# EAGLE board PI2GENESIS-HUB_V20170403 (EAGLE 8.2.2)
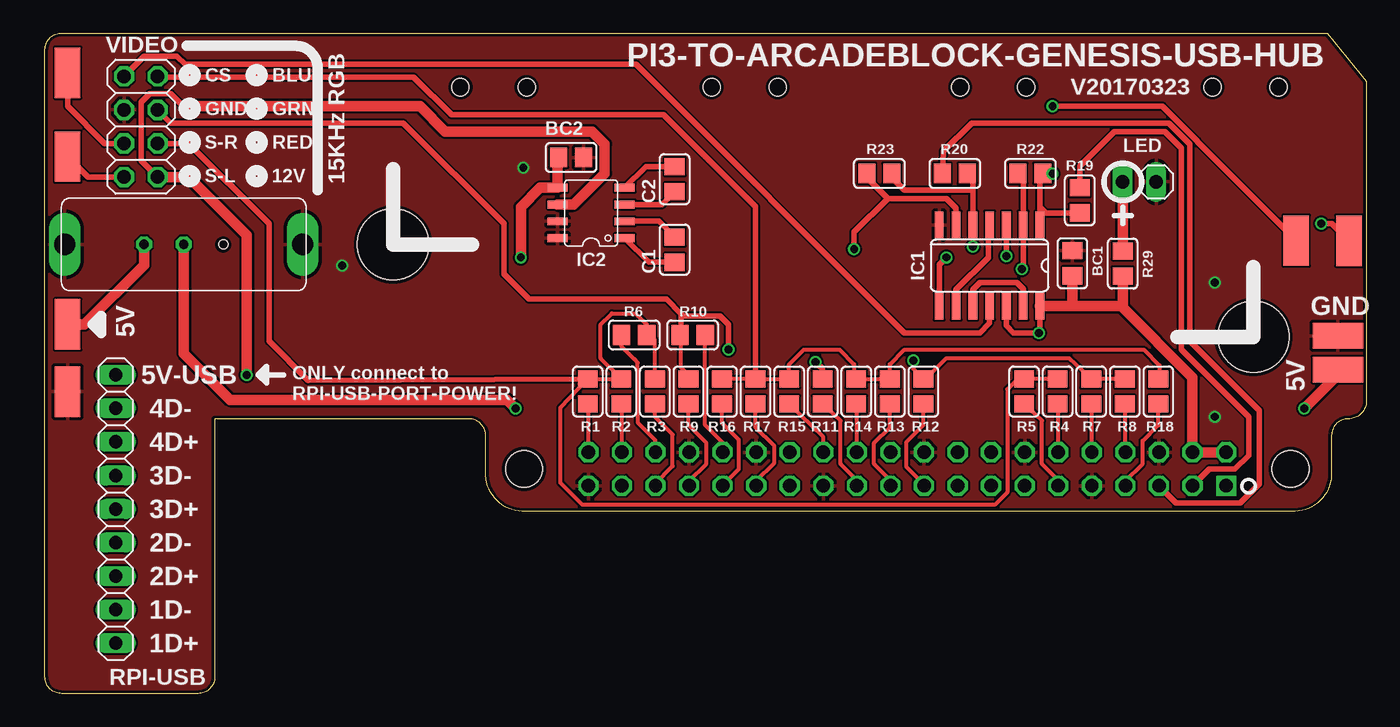
[diagram p0: board, top side]
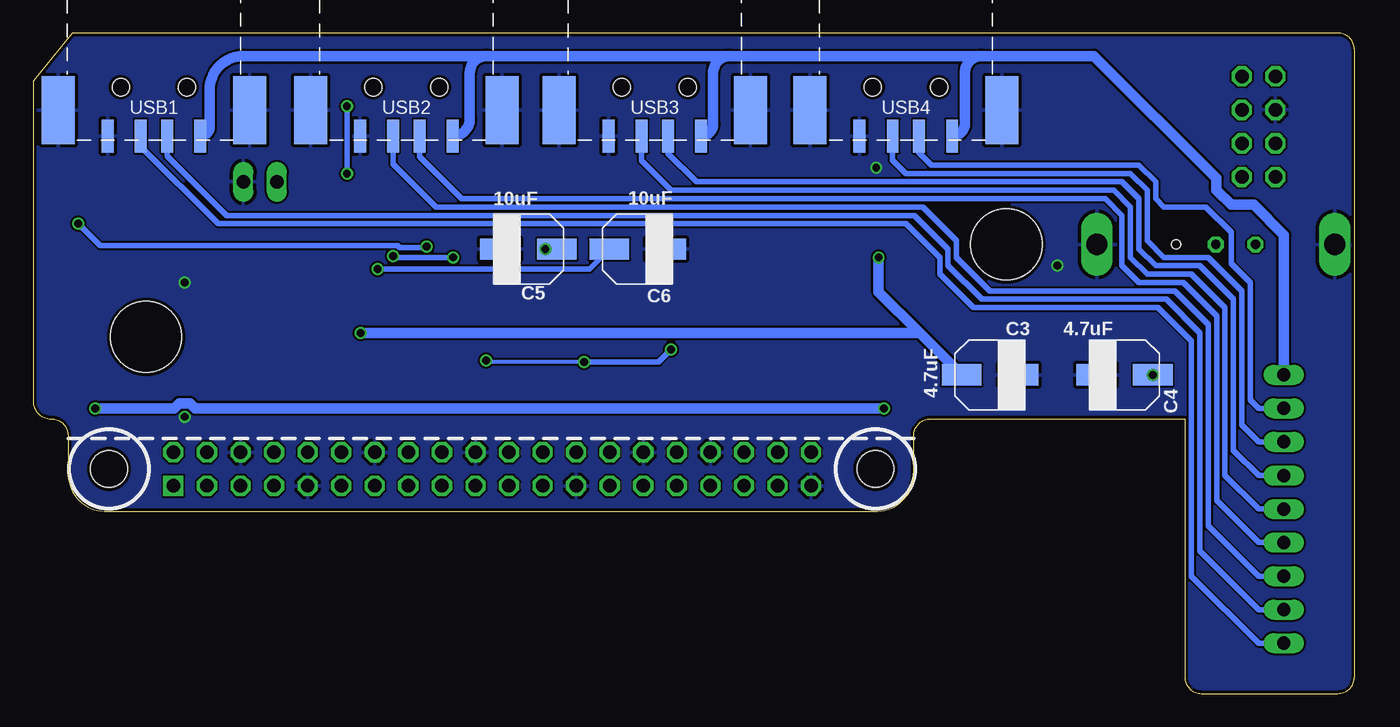
[diagram p1: board, bottom side, seen from below]

Size 100 x 50 mm. Coordinates in mm from the lower left corner, seen from the top.
Outline: 100,46.35 100,22.13 arc-90 98.62,20.8 arc90 97.35,19.53 97.35,16.5 arc-90 94.35,13.8 36.35,13.8 arc-90 33.35,16.5 33.35,19.53 arc90 32.08,20.8 12.85,20.8 12.85,1.27 arc-90 11.58,0 1.27,0 arc-90 0,1.27 0,48.73 arc-90 1.27,50 97.05,50 100,46.35
Copper layers (1*16): Top 0.035mm / dielectric 1.5mm / Bottom 0.035mm
Design rules "ITEADstudioDRC": minimum track width 6mil, minimum drill 12mil, track to track 6mil, track to pad 6mil, pad to pad 6mil, via to via 6mil, smd to smd 0mil, copper to edge 10mil, drill to drill 10mil, minimum pad ring 10mil, minimum via ring 6mil, stop-mask expansion 2mil, vias tented up to drill 100mil, thermal gap 10mil
Holes 5.4 mm at 91.45,27 26.35,34

## Footprints (pad centres in the part's own frame; a part is rotated, then mirrored left to right if it is on the bottom)
Z0805 = smd 1.3 x 1.5: 1 -0.95,0; 2 0.95,0
EEEFPJ101UAR_PANASONIC_VFP-SERIES = smd 1.6 x 3: MINUS 0,2.15; PLUS 0,-2.15
SO14 = smd 0.66 x 2.032: 1 -3.81,-3.073; 2 -2.54,-3.073; 3 -1.27,-3.073; 4 0,-3.073; 5 1.27,-3.073; 6 2.54,-3.073; 7 3.81,-3.073; 8 3.81,3.073; 9 2.54,3.073; 10 1.27,3.073; 11 0,3.073; 12 -1.27,3.073; 13 -2.54,3.073; 14 -3.81,3.073
SO-8 = smd 0.6 x 1.5: 1 -1.905,-2.54; 2 -0.635,-2.54; 3 0.635,-2.54; 4 1.905,-2.54; 5 1.905,2.54; 6 0.635,2.54; 7 -0.635,2.54; 8 -1.905,2.54
1X02 = drill 1.016 long: 1 -1.27,0; 2 1.27,0
PADS = smd 1.93 x 3.81: P$1 0,0
RPI3-GPIO = drill 1.016 square: 1 -24.13,-1.27 | drill 1.016 octagon: 2 -24.13,1.27; 3 -21.59,-1.27; 4 -21.59,1.27; 5 -19.05,-1.27; 6 -19.05,1.27; 7 -16.51,-1.27; 8 -16.51,1.27; 9 -13.97,-1.27; 10 -13.97,1.27; 11 -11.43,-1.27; 12 -11.43,1.27; 13 -8.89,-1.27; 14 -8.89,1.27; 15 -6.35,-1.27; 16 -6.35,1.27; 17 -3.81,-1.27; 18 -3.81,1.27; 19 -1.27,-1.27; 20 -1.27,1.27; 21 1.27,-1.27; 22 1.27,1.27; 23 3.81,-1.27; 24 3.81,1.27; 25 6.35,-1.27; 26 6.35,1.27; 27 8.89,-1.27; 28 8.89,1.27; 29 11.43,-1.27; 30 11.43,1.27; 31 13.97,-1.27; 32 13.97,1.27; 33 16.51,-1.27; 34 16.51,1.27; 35 19.05,-1.27; 36 19.05,1.27; 37 21.59,-1.27; 38 21.59,1.27; 39 24.13,-1.27; 40 24.13,1.27 | hole 2.8: -29,0; 29,0
1X09 = drill 1.016 long: 1 -10.16,0; 2 -7.62,0; 3 -5.08,0; 4 -2.54,0; 5 0,0; 6 2.54,0; 7 5.08,0; 8 7.62,0; 9 10.16,0
ALPS-SSSU011700 = drill 1.6 long: GND@1 9,0; GND@2 -9,0 | drill 0.7 octagon: VCC@1 0,0; VCC@2 3,0 | hole 0.7: -3,0
USB-GENESIS-HUB = smd 0.9 x 2.5: 1 -3.5,3.7; 2 -1,3.7; 3 1,3.7; 4 3.5,3.7 | smd 2.5 x 5.15: GND@1 -7.25,1.725; GND@2 7.25,1.725 | hole 1.3: -2.5,0; 2.5,0
2X04 = drill 1.016 octagon: 1 -3.81,-1.27; 2 -3.81,1.27; 3 -1.27,-1.27; 4 -1.27,1.27; 5 1.27,-1.27; 6 1.27,1.27; 7 3.81,-1.27; 8 3.81,1.27

## Placement (x,y rotation side)
BC1  100nF  [Z0805]  77.75,32.57 90 top
BC2  100nF  [Z0805]  39.81,40.58 180 top
C1  220nF  [Z0805]  47.65,33.6 90 top
C2  220nF  [Z0805]  47.65,38.94 90 top
C3  4.7uF  [EEEFPJ101UAR_PANASONIC_VFP-SERIES]  27.58,24.13 270 bottom
C4  4.7uF  [EEEFPJ101UAR_PANASONIC_VFP-SERIES]  17.42,24.13 90 bottom
C5  10uF  [EEEFPJ101UAR_PANASONIC_VFP-SERIES]  62.5,33.66 90 bottom
C6  10uF  [EEEFPJ101UAR_PANASONIC_VFP-SERIES]  54.25,33.66 270 bottom
IC1  4070D  [SO14]  71.48,32.4 180 top
IC2  ST662A  [SO-8]  41.33,36.38 90 top
LED  LED  [1X02]  82.82,38.73 0 top
PAD1  HS  [PADS]  98.66,34.28 0 top
PAD2  VS  [PADS]  94.68,34.29 0 top
R1  499  [Z0805]  41.07,22.86 90 top
R2  1K  [Z0805]  43.61,22.86 90 top
R3  2K  [Z0805]  46.15,22.86 90 top
R4  4K  [Z0805]  76.63,22.86 90 top
R5  8K  [Z0805]  74.09,22.86 90 top
R6  16K  [Z0805]  44.59,27.15 0 top
R7  499  [Z0805]  79.17,22.86 90 top
R8  1K  [Z0805]  81.71,22.86 90 top
R9  2K  [Z0805]  48.69,22.86 90 top
R10  4K  [Z0805]  49.01,27.15 180 top
R11  8K  [Z0805]  58.85,22.86 90 top
R12  16K  [Z0805]  66.47,22.86 90 top
R13  499  [Z0805]  63.93,22.86 90 top
R14  1K  [Z0805]  61.39,22.86 90 top
R15  2K  [Z0805]  56.31,22.86 90 top
R16  4K  [Z0805]  51.23,22.86 90 top
R17  8K  [Z0805]  53.77,22.86 90 top
R18  16K  [Z0805]  84.25,22.86 90 top
R19  120  [Z0805]  78.3,37.34 90 top
R20  120  [Z0805]  68.85,39.37 180 top
R22  4K7  [Z0805]  74.57,39.37 0 top
R23  4K7  [Z0805]  63.14,39.37 0 top
R29  220  [Z0805]  81.55,32.55 270 top
RPI3  GPIO  [RPI3-GPIO]  65.25,17 0 bottom
RPI-USB  RPI-USB  [1X09]  5.35,13.97 90 top
U$1  OUT  [PADS]  97.84,24.53 270 top
U$2  SND-L  [PADS]  1.72,40.64 180 top
U$3  SND-R  [PADS]  1.72,46.99 180 top
U$4  ALPS-SSSU011700  [ALPS-SSSU011700]  10.5,34 180 top
U$5  IN  [PADS]  1.72,27.94 180 top
U$6  GND  [PADS]  1.72,22.86 180 top
U$7  GND  [PADS]  97.84,27.07 90 top
USB1  USB-GENESIS-HUB  [USB-GENESIS-HUB]  90.85,45.9 180 bottom
USB2  USB-GENESIS-HUB  [USB-GENESIS-HUB]  71.75,45.9 180 bottom
USB3  USB-GENESIS-HUB  [USB-GENESIS-HUB]  52.95,45.9 180 bottom
USB4  USB-GENESIS-HUB  [USB-GENESIS-HUB]  33.95,45.9 180 bottom
VIDEO  VIDEO  [2X04]  7.26,42.91 270 top

## Library data of the parts
BC1 BC2 C1-C6 IC2 PAD1 PAD2 R1-R20 R22 R23 R29 RPI3 U$1-U$7 USB1-USB4 = arcadetv
IC1 = 40xx
LED RPI-USB VIDEO = pinhead

## Nets
+3V3: RPI3.1
+5V: BC1.1 BC2.2 C3.PLUS IC1.12 IC1.14 IC2.5 R29.2 RPI3.2 RPI3.4
+5V-IN: U$4.VCC@2 U$5.P$1
+5V-OUT: U$1.P$1 U$4.VCC@1
+12V: C4.PLUS IC2.6 VIDEO.8
B: R13.2 R14.2 R15.2 R16.2 R17.2 R18.2 VIDEO.2
CS: IC1.11 VIDEO.1
G: R7.2 R8.2 R9.2 R10.2 R11.2 R12.2 VIDEO.4
GND: BC1.2 BC2.1 C3.MINUS C4.MINUS C5.MINUS C6.MINUS IC1.7 IC2.7 IC2.8 LED.2 RPI3.6 RPI3.9 RPI3.14 RPI3.20 RPI3.25 RPI3.30 RPI3.34 RPI3.39 U$4.GND@1 U$4.GND@2 U$6.P$1 U$7.P$1 USB1.4 USB1.GND@1 USB1.GND@2 USB2.4 USB2.GND@1 USB2.GND@2 USB3.4 USB3.GND@1 USB3.GND@2 USB4.4 USB4.GND@1 USB4.GND@2 VIDEO.3
GPIO2: R19.2 RPI3.3
GPIO3: R20.2 RPI3.5
GPIO4: R18.1 RPI3.7
GPIO5: R17.1 RPI3.29
GPIO6: R16.1 RPI3.31
GPIO7: R15.1 RPI3.26
GPIO8: R14.1 RPI3.24
GPIO9: R13.1 RPI3.21
GPIO10: R12.1 RPI3.19
GPIO11: R11.1 RPI3.23
GPIO12: R10.1 RPI3.32
GPIO13: R9.1 RPI3.33
GPIO14: R8.1 RPI3.8
GPIO15: R7.1 RPI3.10
GPIO16: R6.1 RPI3.36
GPIO17: R5.1 RPI3.11
GPIO18: R4.1 RPI3.12
GPIO19: R3.1 RPI3.35
GPIO20: R2.1 RPI3.38
GPIO21: R1.1 RPI3.40
N$1: C1.2 IC2.2
N$2: C1.1 IC2.1
N$3: C2.1 IC2.3
N$4: C2.2 IC2.4
N$6: LED.1 R29.1
N$7: IC1.1 PAD2.P$1 R19.1 R22.2
N$8: C5.PLUS IC1.6 R23.1
N$9: IC1.4 IC1.9
N$10: IC1.10 IC1.13
N$11: IC1.5 PAD1.P$1 R20.1 R23.2
N$13: IC1.3 IC1.8
N$14: C6.PLUS IC1.2 R22.1
R: R1.2 R2.2 R3.2 R4.2 R5.2 R6.2 VIDEO.6
SND-L: U$2.P$1 VIDEO.7
SND-R: U$3.P$1 VIDEO.5
USB1-D+: RPI-USB.1 USB1.3
USB1-D-: RPI-USB.2 USB1.2
USB2-D+: RPI-USB.3 USB2.3
USB2-D-: RPI-USB.4 USB2.2
USB3-D+: RPI-USB.5 USB3.3
USB3-D-: RPI-USB.6 USB3.2
USB4-D+: RPI-USB.7 USB4.3
USB4-D-: RPI-USB.8 USB4.2
VCC/2: RPI-USB.9 USB1.1 USB2.1 USB3.1 USB4.1

## Tracks (layer width: path | path; a pad name or v marks a point on that pad's centre or on a via)
+5V  (via drill 0.6)
  Top 0.406: IC1.14 75.29,27.39 v75.2,27.3 73.3,27.3 72.75,27.85 IC1.12
  Top 0.813: RPI3.2 RPI3.4 86.84,23.92 81.44,29.33 | 77.75,29.33 81.44,29.33 | IC1.14 77.75,29.33 | BC1.1 77.75,29.33 | 81.44,29.33 81.55,29.45 R29.2 | v36.01,33.02 36.01,36.83 37.47,38.29 IC2.5 38.79,40.51 BC2.2
  Bottom 0.813: C3.PLUS 32.9,27.3 | 32.9,27.3 v75.2,27.3 | 32.9,27.3 36.01,30.41 v36.01,33.02
+5V-IN
  Top 0.813: U$4.VCC@2 7.5,32.45 2.99,27.94 U$5.P$1
+5V-OUT  (via drill 0.6)
  Top 0.813: U$4.VCC@1 10.5,25.75 14.02,22.23 34.97,22.23 v35.61,21.59 | v95.3,21.59 97.84,24.13 U$1.P$1
  Bottom 0.813: v35.61,21.59 87.74,21.59 88.12,21.97 88.96,21.97 89.33,21.59 v95.3,21.59
+12V  (via drill 0.6)
  Top 0.406: 10.61,44.45 10.45,44.45 9.5,45.4 7.91,45.4 7.27,44.77 7.27,40.35 VIDEO.8
  Top 0.813: VIDEO.8 10.88,39.1 15.27,34.71 C4.PLUS | IC2.6 40.01,37.02 42.36,39.37 42.36,41.59 41.41,42.55 30.29,42.55 28.39,44.45 10.61,44.45
  other vias: 15.27,24.13
B
  Top 0.305: R16.2 R17.2 R15.2 56.31,24.92 57.42,26.04 60.12,26.04 61.23,24.92 61.23,23.87 R14.2 R13.2 63.93,24.92 65.04,26.04 83.14,26.04 84.33,24.84 84.33,23.79 R18.2
  Top 0.406: R17.2 53.77,36.85 46.8,43.81 30.75,43.81 27.9,46.67 8.58,46.67 VIDEO.2
CS
  Top 0.406: IC1.11 71.48,28.03 70.76,27.3 65.04,27.3 44.72,47.62 10.61,47.62 9.97,48.26 7.53,48.26 VIDEO.1
G  (via drill 0.6)
  Top 0.305: R9.2 48.69,24.13 48.14,24.69 48.14,27.12 R10.2 | R8.2 R7.2 77.48,25.4 68.22,25.4 66.53,23.71 R12.2 65.7,24.58 v65.7,25.2
  Top 0.406: 48.14,28.73 47.03,29.84 36.64,29.84 34.74,31.75 34.74,35.56 27.12,43.18 9.53,43.18 VIDEO.4 | 48.14,28.73 48.14,27.17 R10.2 | R11.2 58.85,24.61 58.69,24.77 58.61,24.77 v58.3,25.08 | v51.71,26.04 51.71,27.94 51.07,28.57 48.3,28.57 48.14,28.73
  Bottom 0.305: v58.3,25.08 65.58,25.08 v65.7,25.2
  Bottom 0.406: v58.3,25.08 52.66,25.08 v51.71,26.04
GND  (via drill 0.6)
  other vias: 88.54,20.95 22.5,32.38 88.54,31.11 36.2,39.81
  pour Top: 101.35,18.3 101.35,51.3 -0.65,51.3 -0.65,-0.7 13.55,-0.7 13.55,18.3 32.35,18.3 32.35,13.3 98.35,13.3 98.35,18.3
  pour Bottom: 101.35,51.3 101.35,18.3 98.35,18.3 98.35,13.3 32.35,13.3 32.35,18.3 13.55,18.3 13.55,-0.7 -0.65,-0.7 -0.65,51.3
GPIO2
  Top 0.406: RPI3.3 88.1,16.99 90.05,16.99 91.08,18.02 91.08,20.95 86,26.04 86,41.27 84.73,42.55 80.92,42.55 78.3,39.93 R19.2
GPIO3
  Top 0.406: RPI3.5 85.58,14.45 90.44,14.45 91.87,15.88 91.87,21.43 86.63,26.67 86.63,41.59 85.05,43.18 70.12,43.18 68,41.06 R20.2
GPIO4
  Top 0.305: RPI3.7 81.76,16.08 83.06,17.38 83.06,19.13 84.25,20.32 R18.1
GPIO5
  Top 0.305: RPI3.29 53.82,16.08 55.2,17.46 55.2,18.73 53.77,20.16 R17.1
GPIO6
  Top 0.305: RPI3.31 51.28,15.76 52.5,16.99 52.5,19.21 51.23,20.48 R16.1
GPIO7
  Top 0.305: RPI3.26 58.9,19.42 R15.1
GPIO8
  Top 0.305: RPI3.24 61.44,21.96 R14.1
GPIO9
  Top 0.305: RPI3.21 63.98,16.14 62.74,17.38 62.74,18.97 63.93,20.16 R13.1
GPIO10
  Top 0.305: RPI3.19 66.52,15.83 65.2,17.14 65.2,19.05 66.47,20.32 R12.1
GPIO11
  Top 0.305: RPI3.23 61.44,16.14 60.2,17.38 60.2,20.66 R11.1
GPIO12
  Top 0.305: RPI3.32 51.28,19 49.96,20.32 49.96,26.93 R10.1
GPIO13
  Top 0.305: RPI3.33 48.74,16.08 50.04,17.38 50.04,18.97 48.69,20.32 R9.1
GPIO14
  Top 0.305: RPI3.8 81.76,21.96 R8.1
GPIO15
  Top 0.305: RPI3.10 79.22,21.96 R7.1
GPIO16
  Top 0.305: RPI3.36 46.2,19.16 44.88,20.48 44.85,25.05 44.59,25.31 43.64,26.26 R6.1
GPIO17
  Top 0.305: RPI3.11 76.68,16.14 75.44,17.38 75.44,20.66 R5.1
GPIO18
  Top 0.305: RPI3.12 76.68,21.96 R4.1
GPIO19
  Top 0.305: RPI3.35 46.2,15.92 47.5,17.22 47.5,19.61 46.15,20.95 R3.1
GPIO20
  Top 0.305: RPI3.38 43.66,21.96 R2.1
GPIO21
  Top 0.305: RPI3.40 41.12,21.96 R1.1
N$1
  Top 0.406: C1.2 46.45,35.75 IC2.2
N$2
  Top 0.406: C1.1 45.7,32.65 IC2.1
N$3
  Top 0.406: C2.1 46.68,37.02 IC2.3
N$4
  Top 0.406: C2.2 45.47,39.88 IC2.4
N$6
  Top 0.813: R29.1 LED.1
N$7  (via drill 0.6)
  Top 0.406: 75.29,36.83 IC1.1 | 75.29,36.83 75.29,39.24 arc-90 R22.2 v76.25,39.37 | PAD2.P$1 87.19,41.77 87.19,41.82 84.57,44.45 v76.25,44.45 | R19.1 75.74,36.39 75.29,36.83
  Bottom 0.406: v76.25,44.45 v76.25,39.37
N$8  (via drill 0.6)
  Top 0.406: IC1.6 68.94,36.74 68.22,37.47 63.77,37.47 | 63.77,37.47 62.5,38.73 62.5,39.16 R23.1 | v61.23,33.66 61.23,34.92 63.77,37.47
  Bottom 0.406: C5.PLUS v61.23,33.66
N$9
  Top 0.406: IC1.9 68.94,30.57 71.39,33.02 71.39,35.38 IC1.4
N$10
  Top 0.406: IC1.10 70.21,30.57 70.76,31.11 73.54,31.11 74.02,30.63 IC1.13
N$11  (via drill 0.6)
  Top 0.406: 70.21,38.1 IC1.5 v70.21,33.83 | 70.21,38.1 70.21,38.86 R20.1 | R23.2 63.99,39.16 65.04,38.1 70.21,38.1 | PAD1.P$1 97.38,35.56 v96.57,35.56
  Bottom 0.406: v96.57,35.56 94.93,33.92 72.42,33.92 72.26,33.76 70.21,33.76 v70.21,33.83
N$13  (via drill 0.6)
  Top 0.406: IC1.3 v72.75,33.11 72.66,33.02 | IC1.8 67.67,32.48 v68.22,33.02
  Bottom 0.406: v68.22,33.02 72.66,33.02 v72.75,33.11
N$14  (via drill 0.6)
  Top 0.406: R22.1 arc-90 74.02,39.06 IC1.2 74.02,32.48 v73.93,32.15
  Bottom 0.406: v73.93,32.15 57.91,32.15 C6.PLUS
R
  Top 0.305: R3.2 46.15,26.77 R6.2 45.54,27.94 44.7,28.78 42.9,28.78 42.05,27.94 42.05,25.37 R2.2 R1.2 39.01,21.65 39.01,15.95 40.68,14.29 71.87,14.29 72.82,15.24 72.82,23.02 73.51,23.71 R5.2 R4.2
  Top 0.406: R1.2 19.92,23.71 16.96,26.67 16.96,35.56 10.88,41.64 VIDEO.6
SND-L
  Top 0.406: U$2.P$1 3.26,39.1 VIDEO.7
SND-R
  Top 0.406: VIDEO.5 4.53,41.64 1.72,44.45 U$3.P$1
USB1-D+
  Bottom 0.406: RPI-USB.1 7.26,3.81 12.34,8.89 12.34,26.67 14.88,29.21 28.85,29.21 31.39,31.75 31.39,33.02 33.93,35.56 86,35.56 91.85,41.41 USB1.3
USB1-D-
  Bottom 0.406: RPI-USB.2 7.26,6.35 11.7,10.79 11.7,27.3 14.24,29.84 28.21,29.84 30.75,32.38 30.75,33.66 33.29,36.2 85.36,36.2 89.85,40.68 USB1.2
USB2-D+
  Bottom 0.406: RPI-USB.3 7.26,8.89 11.07,12.7 11.07,27.94 13.61,30.48 27.58,30.48 30.12,33.02 30.12,34.29 32.66,36.83 69.49,36.83 72.75,40.09 USB2.3
USB2-D-
  Bottom 0.406: RPI-USB.4 7.26,11.43 10.43,14.61 10.43,28.57 12.97,31.11 16.32,31.11 17.59,32.38 17.59,36.2 18.86,37.47 67.58,37.47 70.75,40.63 USB2.2
USB3-D+
  Bottom 0.406: RPI-USB.5 7.26,13.97 9.8,16.51 9.8,29.21 12.34,31.75 15.69,31.75 16.96,33.02 16.96,36.83 18.23,38.1 51.71,38.1 53.95,40.34 USB3.3
USB3-D-
  Bottom 0.406: RPI-USB.6 7.26,16.51 9.16,18.41 9.16,29.84 11.7,32.38 15.05,32.38 16.32,33.66 16.32,37.47 17.59,38.73 49.8,38.73 51.95,40.88 USB3.2
USB4-D+
  Bottom 0.406: RPI-USB.7 7.26,19.05 8.53,20.32 8.53,30.48 11.07,33.02 14.42,33.02 15.69,34.29 15.69,38.1 16.96,39.37 33.93,39.37 34.95,40.39 USB4.3
USB4-D-
  Bottom 0.406: RPI-USB.8 7.26,21.59 7.89,22.23 7.89,31.11 9.34,32.56 9.34,34.92 11.24,36.83 14.42,36.83 15.05,37.47 15.05,38.73 16.32,40.01 32.02,40.01 32.95,40.93 USB4.2
VCC/2
  Bottom 0.813: 28.21,48.26 arc-90 29.48,46.99 29.48,43.17 arc90 USB4.1 | 28.21,48.26 19.71,48.26 10.45,39 10.45,38.11 9.34,37 7.64,37 5.35,34.72 RPI-USB.9 | USB3.1 arc-90 48.53,43.12 48.53,46.99 arc90 47.26,48.26 | 47.26,48.26 28.21,48.26 | USB2.1 arc-90 66.95,43.5 66.95,46.99 arc90 65.68,48.26 | 65.68,48.26 47.26,48.26 | USB1.1 arc-90 86.63,42.92 86.63,45.72 arc90 84.09,48.26 65.68,48.26 | RPI-USB.9 | RPI-USB.9

## Text on the board
tPlace: PI3-TO-ARCADEBLOCK-GENESIS-USB-HUB | 15KHz RGB | CS | BLU | V20170323 | GND | GRN | S-R | RED | S-L | 12V | GND | 5V | 5V-USB | 5V | ONLY connect to / RPI-USB-PORT-POWER! | 4D- | 4D+ | 3D- | 3D+ | 2D- | 2D+ | 1D- | 1D+